# Altium PCB mach trai tim.PcbDoc
Units mm, origin at the board's own origin, x right, y up, seen from the top; angles counter-clockwise.
Board outline 94.49 x 99.69 mm, 2 copper layers (Top Layer, Bottom Layer); 18 components, 16 nets, 57 pads, 0 vias.
Unrouted connection lines stored in the file: 39.
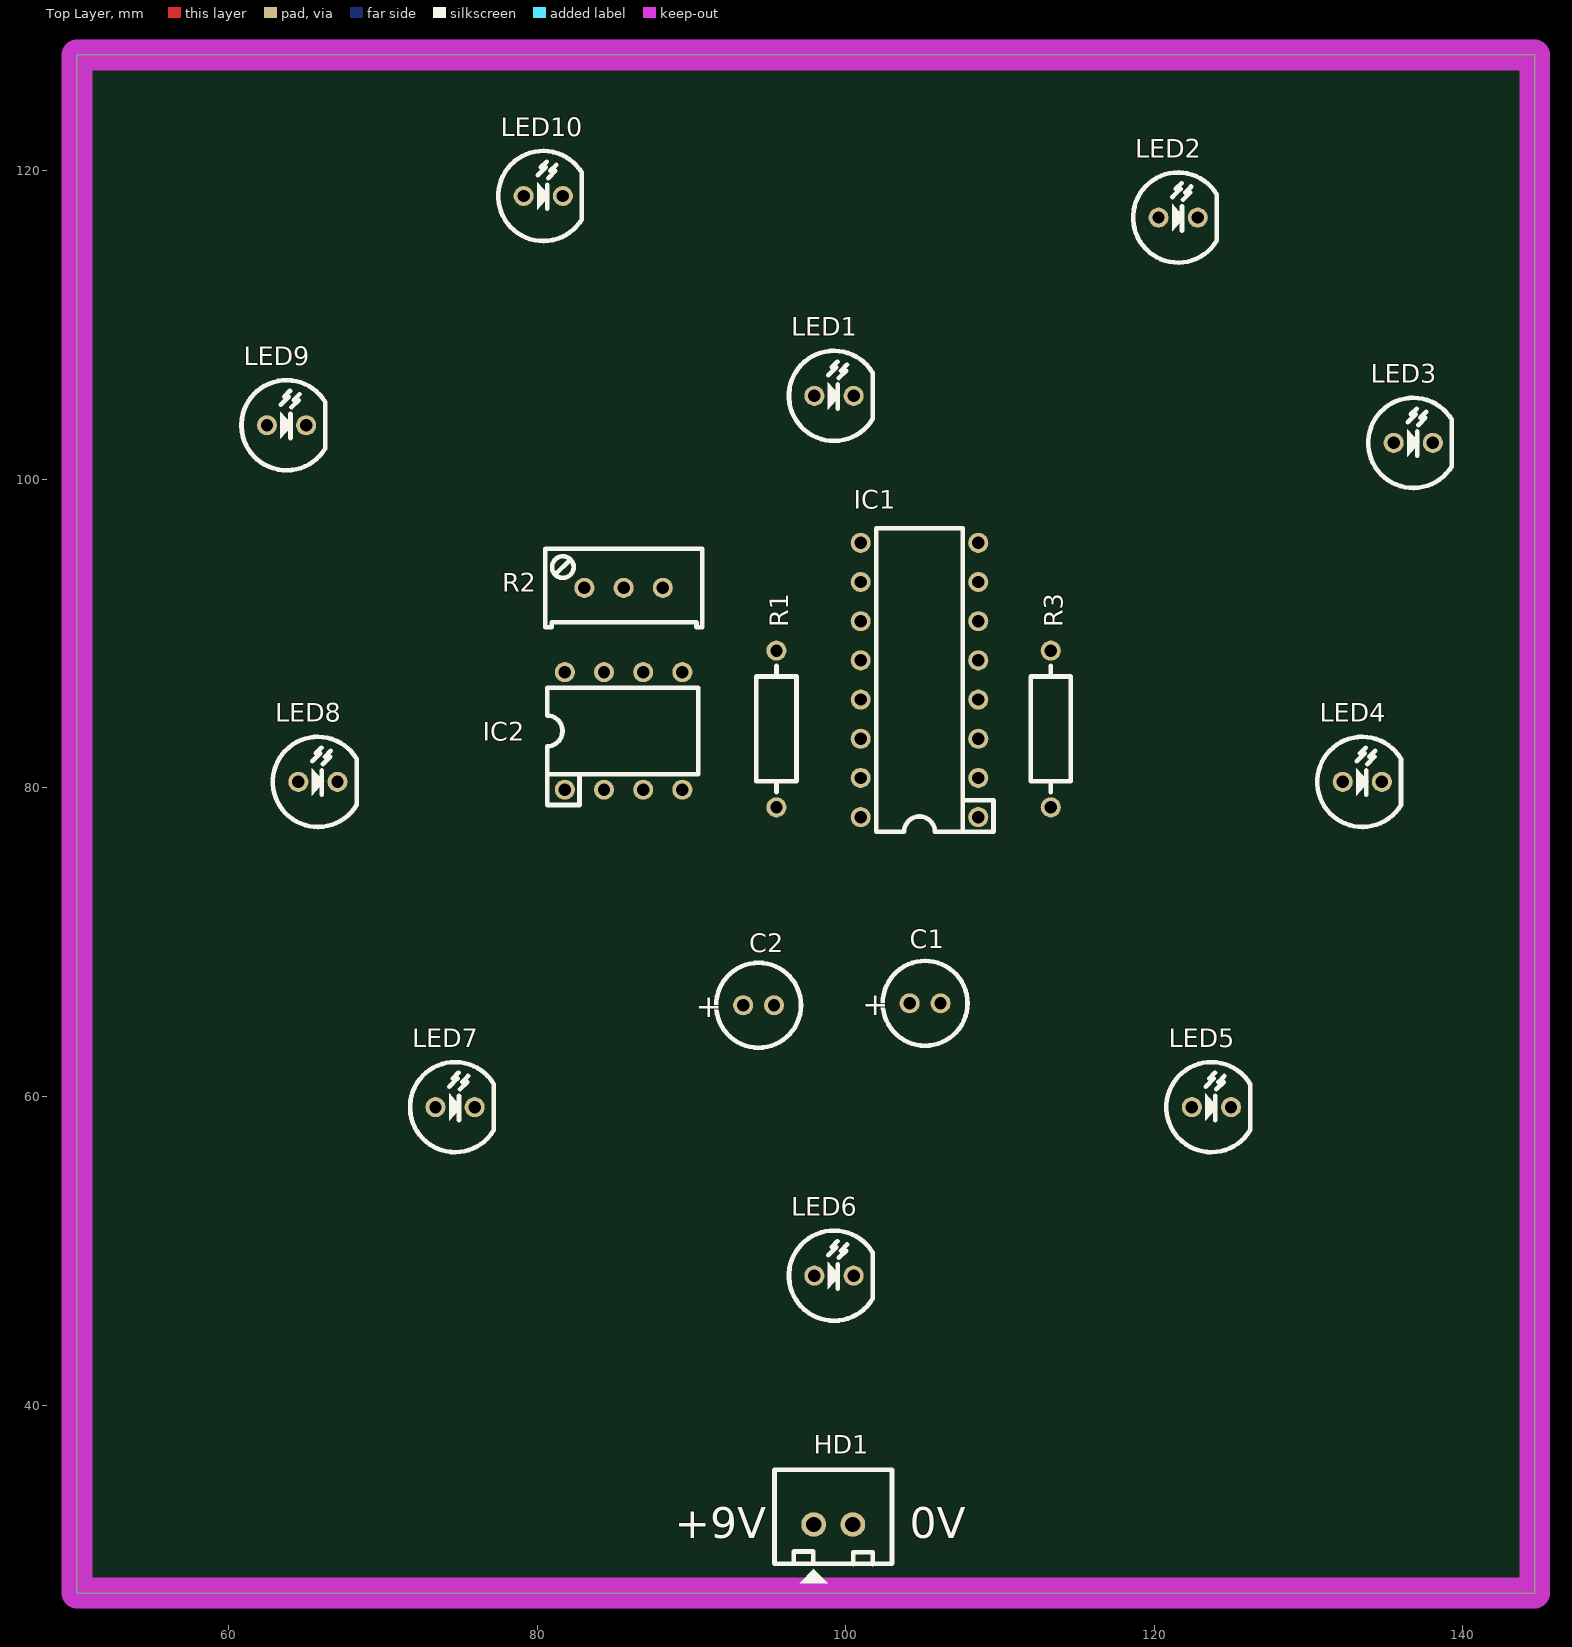
[diagram p0: Top Layer view]
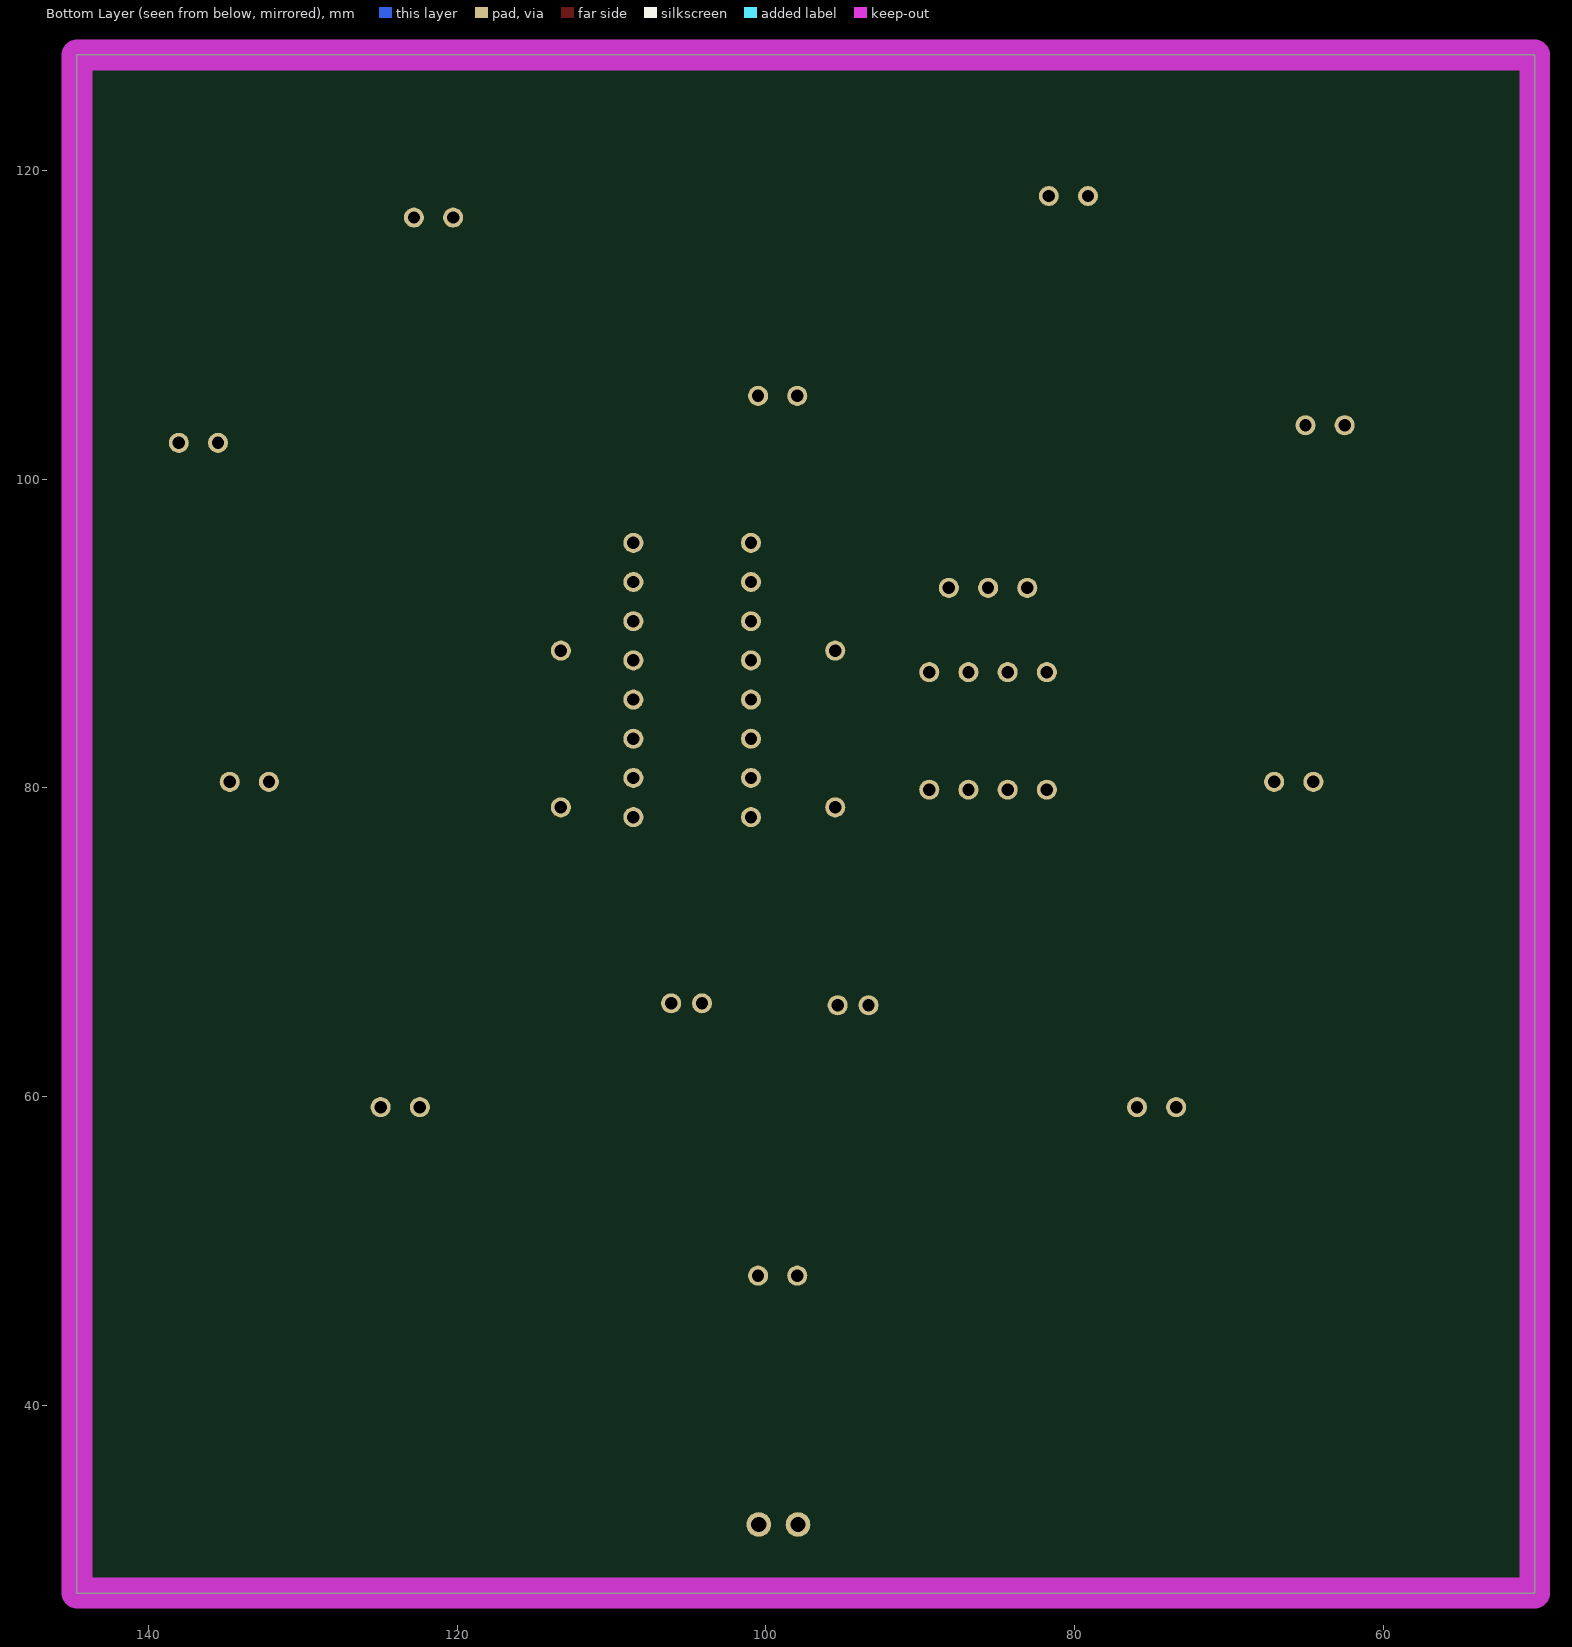
[diagram p1: Bottom Layer view, seen from below]

## Layer stack, top to bottom
Top Solder: solder mask 0.0102, Solder Resist, Dk 3.5
Top Layer: signal copper 0.0356
Dielectric 1: dielectric 0.32, FR-4, Dk 4.8
Bottom Layer: signal copper 0.0356
Bottom Solder: solder mask 0.0102, Solder Resist, Dk 3.5

## Board outline
50.165,27.813 50.165,127.508 144.653,127.508 144.653,27.813

## Design rules (kind name [scope] priority, off if disabled: settings)
Clearance [All] p1: gap=0.5
PolygonConnect [All] p1: connectstyle=Relief reliefconductorwidth=0.254 reliefentries=4 polygonreliefangle="90 Angle" airgapwidth=0.254
RoutingVias [All] p1: holewidth=0.711 width=1.27 viastyle="Through Hole" minholewidth=0.711 minwidth=1.27 maxholewidth=0.711 maxwidth=1.27
SolderMaskExpansion [All] p1: expansion=0.102
Width [All] p1: maxlimit=2 minlimit=0.5 preferedwidth=0.5
30 further rules are at their usual default settings.

## Components (designator, comment, footprint, x,y, rotation, side; value= is the part's Value field where it differs from the comment)
C1 "10uF,50V" CAP_1UF_50V 104.14,66.04 r0 top
C2 "1uF,50V" CAP_1UF_50V 93.345,65.913 r0 top
HD1 "5VDC" "CON 2" 99.187,32.258 r0 top
IC1 "4017" 74HC4017 108.585,78.105 r90 top
IC2 "NE555" LM555 81.788,79.883 r0 top
LED1 "LED_R_5" LED5R 97.965,105.41 r0 top
LED2 "LED_R_5" LED5R 120.269,116.967 r0 top
LED3 "LED_R_5" LED5R 135.509,102.362 r0 top
LED4 "LED_R_5" LED5R 132.207,80.391 r0 top
LED5 "LED_R_5" LED5R 122.428,59.309 r0 top
LED6 "LED_R_5" LED5R 97.965,48.387 r0 top
LED7 "LED_R_5" LED5R 73.406,59.309 r0 top
LED8 "LED_R_5" LED5R 64.516,80.391 r0 top
LED9 "LED_R_5" LED5R 62.484,103.505 r0 top
LED10 "LED_R_5" LED5R 79.121,118.364 r0 top
R1 "CF1/4W2K2J25" "RES 1/4W CFR25" 95.504,88.9 r270 top
R2 "10K" VR1 83.058,92.964 r0 top
R3 "CF1/4W330RJ25" "RES 1/4W CFR25" 113.284,78.74 r90 top

## Footprints (in the part's own frame and the unit in brackets; to place one, negate y for a bottom-side part, rotate by r counter-clockwise, add the part's x,y. Pads: shape width x height; smd on the part's side, far side on the other; paste and mask are expansions set on the pad)
74HC4017 [mm] "DIP 16, 16 PIN, W 7.62, Pin to pin 2.54MM"
  round 1.3 hole 0.8: 1(0,0) 2(2.54,0) 3(5.08,0) 4(7.62,0) 5(10.16,0) 6(12.7,0) 7(15.24,0) 8(17.78,0) 9(17.78,7.62) 10(15.24,7.62) 11(12.7,7.62) 12(10.16,7.62) 13(7.62,7.62) 14(5.08,7.62) 15(2.54,7.62) 16(0,7.62)
  silkscreen extent -0.95,-0.99 18.73,6.61, body extent -1.41,-0.07 19.19,7.69, height 4.5
CAP_1UF_50V [mm] "Capacitor, Electrolytic, Radial; Body 5 x 11 mm (Dia.xH typ); Pin Spacing 2 mm (typ)"
  round 1.3 hole 0.8: 1(0,0) 2(2,0)
  silkscreen extent -1.75,-2.75 3.75,2.75, body extent -1.53,-2.53 3.53,2.53, height 11.53
"CON 2" [mm] "Header 2.54mm Through Hole"
  round 1.6 hole 1 mask+0.1: 1(-1.27,0) 2(1.27,0)
  silkscreen extent -3.81,-3.8 3.81,3.56, body extent -3.75,-2.29 3.75,3.41, height 7
LED5R [mm] "LED, RED, 2 LEAD, 5mm"
  round 1.3 hole 0.8: 1(0,0) 2(2.54,0)
  silkscreen extent -1.65,-2.92 3.77,2.92, body extent -1.71,-3.01 3.71,3.01, height 12.31
LM555 [mm] "DIP 8, 8 PIN, W 7.62, Pin to pin 2.54MM"
  round 1.3 hole 0.8: 1(0,0) 2(2.54,0) 3(5.08,0) 4(7.62,0) 5(7.62,7.62) 6(5.08,7.62) 7(2.54,7.62) 8(0,7.62)
  silkscreen extent -1.15,-0.99 8.65,6.61, body extent -1.2,-0.1 8.7,7.72, height 4.57
"RES 1/4W CFR25" [mm] "Axial Device, Thru-Hole; 2 Leads fi 0.55"
  round 1.3 hole 0.8 mask+0.1: 1(0,0) 2(10.16,0)
  silkscreen extent 0.98,-1.3 9.18,1.3, body extent -0.3,-1.16 10.47,1.16, height 2.93
VR1 [mm] "Variable Resistor"
  round 1.3 hole 0.8 mask+0.1: 1(0,0) 2(2.54,0) 3(5.08,0)
  silkscreen extent -2.54,-2.54 7.65,2.54, body extent -2.22,-3.3 7.3,2.79, height 11.56

## Part data
C1 C2: library part CP1, "Cap P  0,1uF < 22uF , 16 - 50V"
HD1: library part Hed2, "Header 2 (Green)"
IC1: "Decade Counter/Divider with 10 Decoded Outputs"
IC2: library part LM555, "Timer"
LED1 LED2 LED3 LED4 LED5 LED6 LED7 LED8 LED9 LED10: library part LED_RED_5MM, "LED Red 5mm"
R1: "RES CF AXIAL-0.3 5% 1/4W 2K2"
R2: library part VR1, "Var Resistor"
R3: "RES CF AXIAL-0.3 5% 1/4W 330R"

## Nets (pads, with @x,y where several pads share a name; then routed paths per layer and width w, separated by ;. In a path a pad name is that pad's centre, name@x,y a point inside that pad or via, vN(x,y) a via of type N, cw(c..) or ccw(c..) an arc to the next point about the centre after c; other vN are vias at no path point)
GND: C1.2 C2.2 HD1.2 IC1.8 IC1.13 IC1.15 IC2.1 R3.1
NetC2_1: C2.1 IC2.2 IC2.6 R2.3
NetIC1_1: IC1.1 LED6.1
NetIC1_2: IC1.2 LED2.1
NetIC1_3: IC1.3 LED1.1
NetIC1_4: IC1.4 LED3.1
NetIC1_5: IC1.5 LED7.1
NetIC1_6: IC1.6 LED8.1
NetIC1_7: IC1.7 LED4.1
NetIC1_9: IC1.9 LED9.1
NetIC1_10: IC1.10 LED5.1
NetIC1_11: IC1.11 LED10.1
NetIC1_14: IC1.14 IC2.3
NetIC2_7: IC2.7 R1.1 R2.1 R2.2
NetLED1_2: LED1.2 LED2.2 LED3.2 LED4.2 LED5.2 LED6.2 LED7.2 LED8.2 LED9.2 LED10.2 R3.2
VCC: C1.1 HD1.1 IC1.16 IC2.4 IC2.8 R1.2
pads on no net: IC1.12 IC2.5

## Keep-outs
Keep-Out Layer:
  the board outline again, w2

## Silkscreen, mask and mechanical layers (free items; w line width, h text height)
Top Overlay:
  text "+9V" at 88.9,31.369 h2
  text "0V" at 104.14,31.369 h2

## Text inside footprints (layer, text, board x,y; h text height)
C1: Top Overlay "+" at 101.076,65.278 h1.5; Mechanical 1 "2" at 105.84,65.54 h1; Mechanical 1 "1" at 103.94,65.54 h1; Mechanical 1 "+" at 102.64,65.54 h1
C2: Top Overlay "+" at 90.281,65.151 h1.5; Mechanical 1 "2" at 95.045,65.413 h1; Mechanical 1 "1" at 93.145,65.413 h1; Mechanical 1 "+" at 91.845,65.413 h1
HD1: Mechanical 1 "1" at 97.787,31.758 h1; Mechanical 1 "2" at 100.187,31.758 h1
IC1: Mechanical 1 "16" at 102.775,77.755 h1 r90; Mechanical 1 "9" at 102.895,95.565 h1 r90; Mechanical 1 "8" at 107.715,95.405 h1 r90; Mechanical 1 "1" at 107.675,77.855 h1 r90
IC2: Mechanical 1 "1" at 81.538,80.793 h1; Mechanical 1 "4" at 89.038,80.793 h1; Mechanical 1 "5" at 89.038,85.693 h1; Mechanical 1 "8" at 81.438,85.693 h1
R1: Mechanical 1 "R?" at 95.504,88.82 h0.5 r270
R2: Mechanical 1 "3" at 87.828,92.454 h1; Mechanical 1 "2" at 85.298,92.434 h1; Mechanical 1 "1" at 82.918,92.474 h1
R3: Mechanical 1 "R?" at 113.284,78.82 h0.5 r90